# Altium PCB PCB1.PcbDoc
Units mm, origin at the board's own origin, x right, y up, seen from the top; angles counter-clockwise.
Board outline 171.3 x 137.74 mm, 2 copper layers (Top Layer, Bottom Layer); 76 components, 62 nets, 223 pads, 59 vias.
Unrouted connection lines stored in the file: 1.
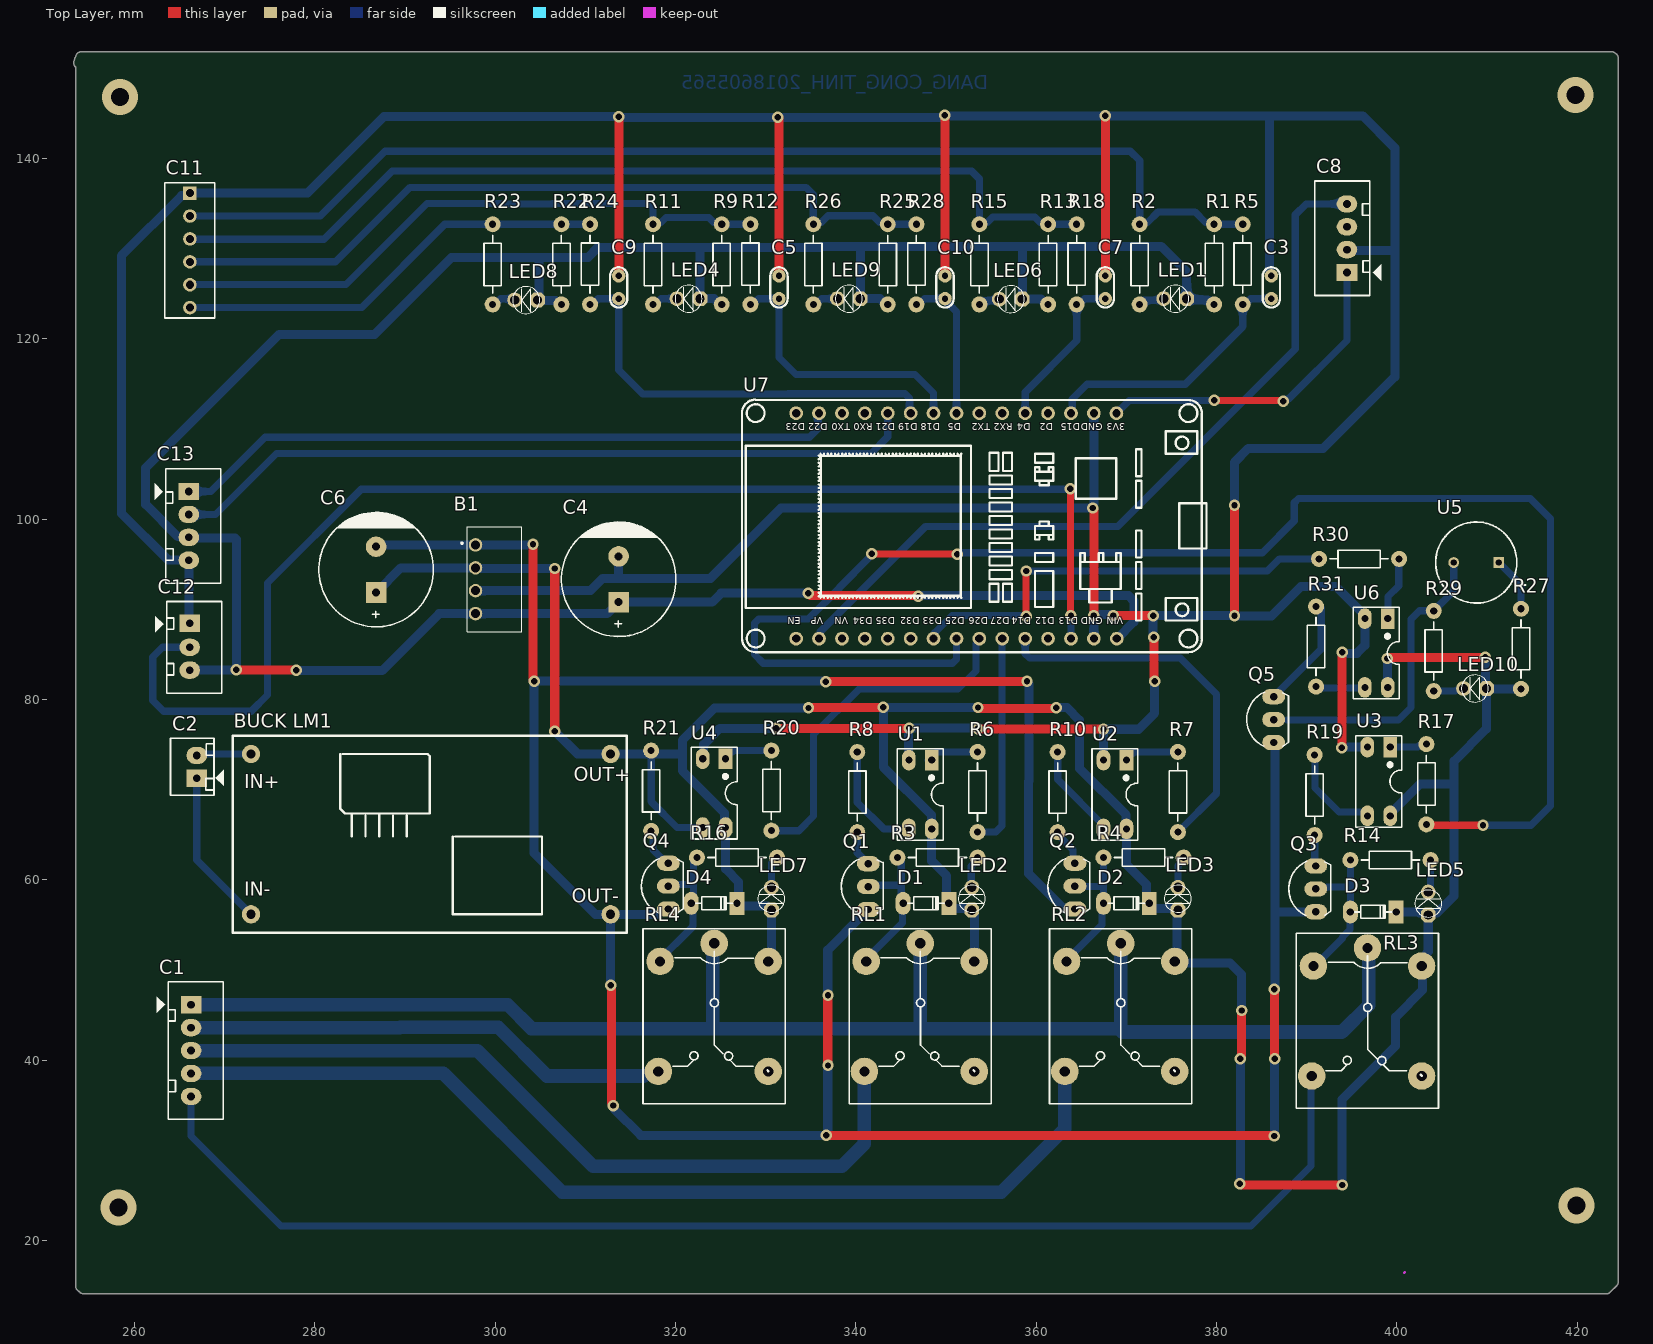
[diagram p0: Top Layer view]
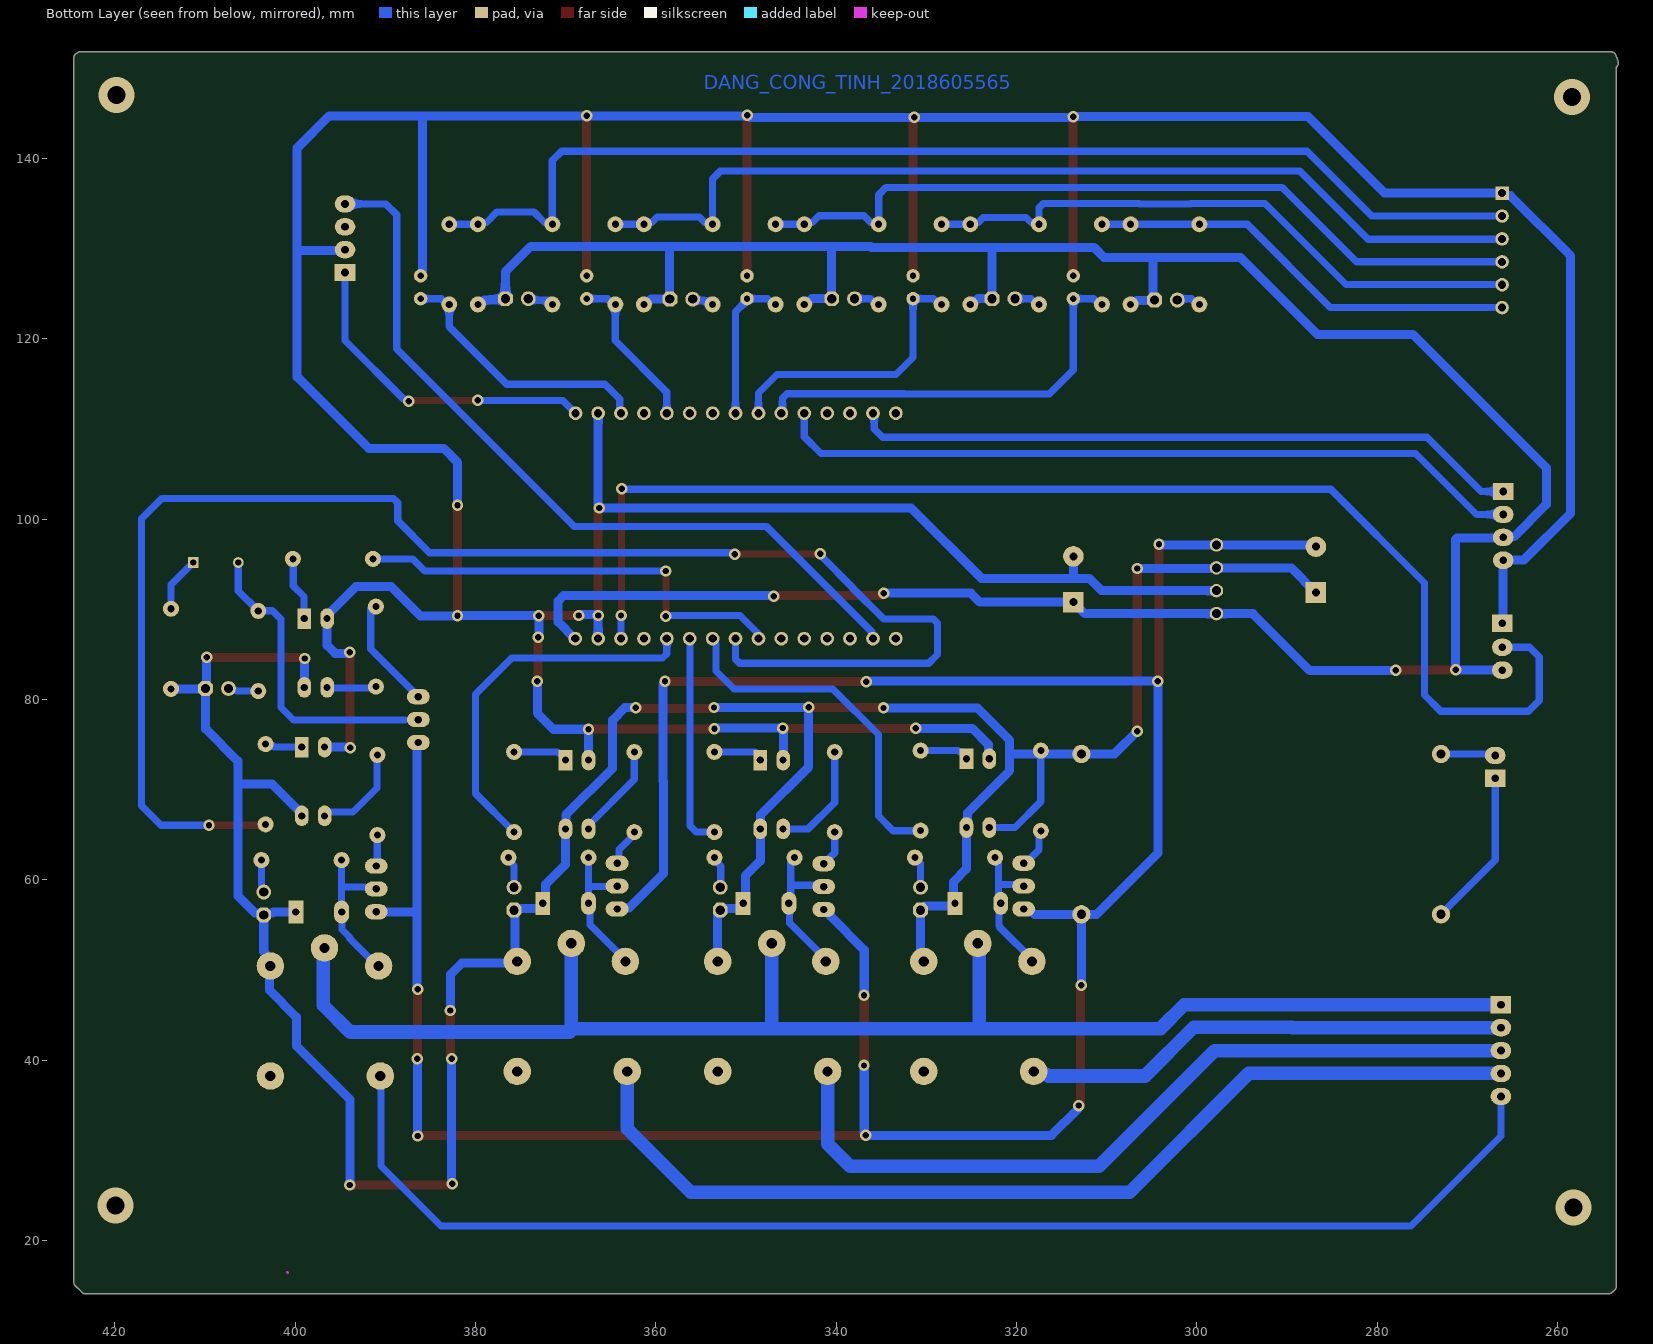
[diagram p1: Bottom Layer view, seen from below]
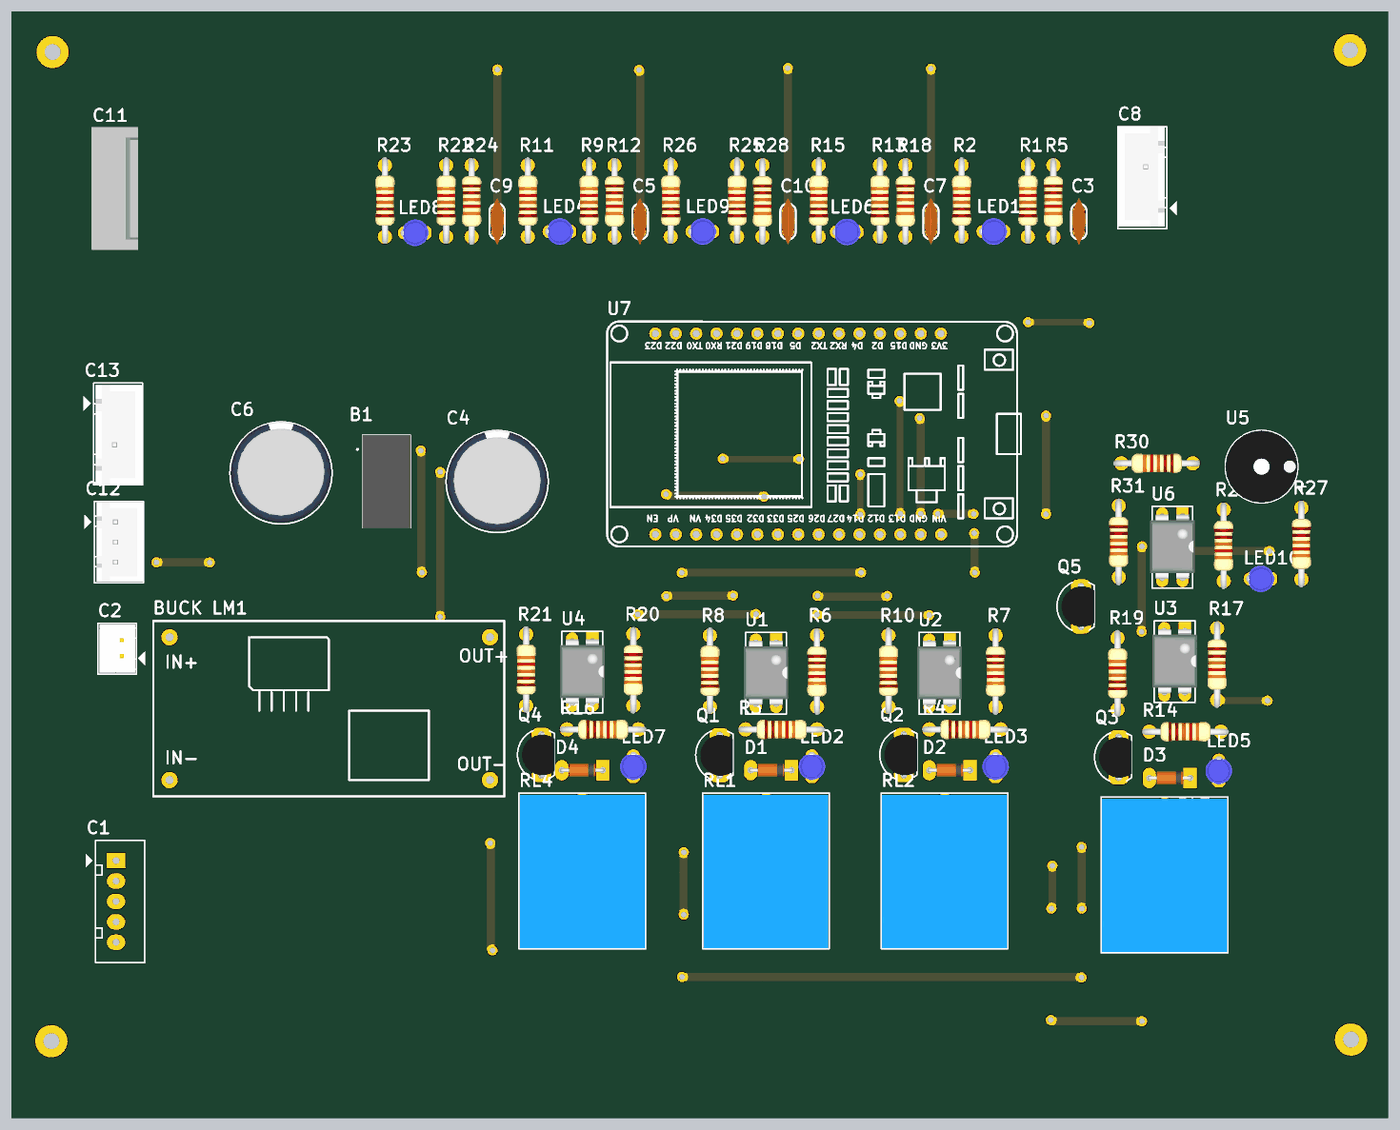
[diagram p2: 3D render of the assembled board from above, using the file's embedded part models]

## Layer stack, top to bottom
Top Solder: solder mask 0.0102, Solder Resist, Dk 3.5
Top Layer: signal copper 0.0356
Dielectric 1: dielectric 0.32, FR-4, Dk 4.8
Bottom Layer: signal copper 0.0356
Bottom Solder: solder mask 0.0102, Solder Resist, Dk 3.5

## Board outline
253.483,14.91 ccw(c254.083,14.91) 253.839,14.361 ccw(c254.33,14.707) 254.334,14.106 423.248,14.106 ccw(c423.248,14.707) 423.673,14.282 424.376,14.985 ccw(c423.951,15.41) 424.552,15.41 424.552,151.155 ccw(c423.951,151.155) 424.183,151.709 ccw(c423.799,151.248) 423.799,151.848 254.083,151.848 ccw(c254.083,151.248) 253.486,151.302 ccw(c254.457,150.597) 253.256,150.597 ccw(c253.857,150.597) 253.483,150.127

## Design rules (kind name [scope] priority, off if disabled: settings)
Clearance [All] p1: gap=1 ignorepadtopadclearanceinfootprint=FALSE
PolygonConnect [All] p1: connectstyle=Relief reliefconductorwidth=0.254 reliefentries=4 polygonreliefangle="90 Angle" airgapwidth=0.254
RoutingVias [All] p1: holewidth=0.711 width=1.27 viastyle="Through Hole" minholewidth=0.711 minwidth=1.27 maxholewidth=0.711 maxwidth=1.27
SolderMaskExpansion [All] p1: expansion=0.102 istentingtop=FALSE
Width GND_ISO [InNet('GND_ISO')] p1: maxlimit=1 minlimit=1 preferedwidth=1
Width COM_O_1 [InNet('COM_O_1')] p2: maxlimit=1.5 minlimit=1.5 preferedwidth=1.5
Width OUT_RL1 [InNet('OUT_RL1')] p3: maxlimit=1.5 minlimit=1.5 preferedwidth=1.5
Width OUT_RL2 [InNet('OUT_RL2')] p4: maxlimit=1.5 minlimit=1.5 preferedwidth=1.5
Width OUT_RL3 [InNet('OUT_RL3')] p5: maxlimit=1.5 minlimit=1.5 preferedwidth=1.5
Width VCC_ISO [InNet('VCC5_ISO')] p6: maxlimit=1 minlimit=1 preferedwidth=1
Width GND [InNet('GND')] p7: maxlimit=1 minlimit=1 preferedwidth=1
Width VCC [InNet('VCC5')] p8: maxlimit=1 minlimit=1 preferedwidth=1
Width SIGNAL [All] p9: maxlimit=0.8 minlimit=0.8 preferedwidth=0.8
30 further rules are at their usual default settings.

## Components (designator, comment, footprint, x,y, rotation, side; value= is the part's Value field where it differs from the comment)
B1 "B0505S1W" B0505S1W 297.815,97.155 r270 top
"BUCK LM1" "Buck LM2596" "BUCK LM2596" 292.481,65.837 r0 top
C1 "Header5" Header5 266.268,46.152 r270 top
C2 "Header2" Header2 266.903,71.272 r90 top
C3 "104" "tu gom" 386.08,125.73 r90 top
C4 "Cap Pol3" CP2/5 313.69,90.805 r90 top value=C?
C5 "104" "tu gom" 331.47,125.73 r90 top
C6 "Cap Pol3" CP2/5 286.791,91.872 r90 top value=C?
C7 "104" "tu gom" 367.665,125.73 r90 top
C8 "SS_HUMI" Header4 394.462,127.356 r90 top
C9 "104" "tu gom" 313.69,125.73 r90 top
C10 "104" "tu gom" 349.885,125.73 r90 top
C11 "Header6" HDR6 266.141,136.169 r270 top
C12 "1_WIRE_2" Header3 266.116,88.341 r270 top
C13 "LCD_I2C" Header4 266.014,103.073 r270 top
D1 "100v" "DIODE 0.5A" 347.777,57.404 r180 top
D2 "100v" "DIODE 0.5A" 370.002,57.404 r180 top
D3 "100v" "DIODE 0.5A" 397.383,56.439 r180 top
D4 "100v" "DIODE 0.5A" 324.282,57.404 r180 top
LED1 "LED 3mm" LED-3MM-BLUE 375.285,124.46 r180 top
LED2 "LED 3mm" LED-3MM-BLUE 352.857,58.039 r90 top
LED3 "LED 3mm" LED-3MM-BLUE 375.717,58.039 r90 top
LED4 "LED 3mm" LED-3MM-BLUE 321.31,124.46 r180 top
LED5 "LED 3mm" LED-3MM-BLUE 403.479,57.506 r90 top
LED6 "LED 3mm" LED-3MM-BLUE 357.048,124.409 r180 top
LED7 "LED 3mm" LED-3MM-BLUE 330.632,58.039 r90 top
LED8 "LED 3mm" LED-3MM-BLUE 303.301,124.308 r180 top
LED9 "LED 3mm" LED-3MM-BLUE 339.09,124.46 r180 top
LED10 "LED 3mm" LED-3MM-BLUE 408.534,81.229 r180 top
Q1 "C1815" C1815_cam 341.376,59.258 r90 top
Q2 "C1815" C1815_cam 364.287,59.309 r90 top
Q3 "C1815" C1815_cam 391.008,59.004 r90 top
Q4 "C1815" C1815_cam 319.202,59.309 r90 top
Q5 "C1815" C1815_cam 386.334,77.775 r90 top
R1 "10K" R1/4W 379.73,132.715 r270 top value="R1/4W - 1K"
R2 "220R" R1/4W 371.475,132.715 r270 top value="R1/4W - 1K"
R3 "510R" R1/4W 353.492,62.484 r180 top value="R1/4W - 1K"
R4 "390R" R1/4W 376.352,62.484 r180 top value="R1/4W - 1K"
R5 "1K" R1/4W 382.905,123.825 r90 top value="R1/4W - 1K"
R6 "100R" R1/4W 353.492,65.309 r90 top value="R1/4W - 1K"
R7 "220R" R1/4W 375.717,65.309 r90 top value="R1/4W - 1K"
R8 "510R" R1/4W 340.157,74.183 r270 top value="R1/4W - 1K"
R9 "10K" R1/4W 325.12,132.715 r270 top value="R1/4W - 1K"
R10 "560R" R1/4W 362.382,74.183 r270 top value="R1/4W - 1K"
R11 "220R" R1/4W 317.5,132.715 r270 top value="R1/4W - 1K"
R12 "1K" R1/4W 328.295,123.825 r90 top value="R1/4W - 1K"
R13 "10K" R1/4W 361.315,132.715 r270 top value="R1/4W - 1K"
R14 "510R" R1/4W 403.733,62.205 r180 top value="R1/4W - 1K"
R15 "220R" R1/4W 353.695,132.715 r270 top value="R1/4W - 1K"
R16 "510R" R1/4W 331.267,62.484 r180 top value="R1/4W - 1K"
R17 "100R" R1/4W 403.276,66.167 r90 top value="R1/4W - 1K"
R18 "1K" R1/4W 364.49,123.825 r90 top value="R1/4W - 1K"
R19 "510R" R1/4W 390.881,73.863 r270 top value="R1/4W - 1K"
R20 "100R" R1/4W 330.632,65.459 r90 top value="R1/4W - 1K"
R21 "510R" R1/4W 317.297,74.333 r270 top value="R1/4W - 1K"
R22 "10K" R1/4W 307.34,132.715 r270 top value="R1/4W - 1K"
R23 "220R" R1/4W 299.72,132.715 r270 top value="R1/4W - 1K"
R24 "1K" R1/4W 310.515,123.825 r90 top value="R1/4W - 1K"
R25 "10K" R1/4W 343.535,132.715 r270 top value="R1/4W - 1K"
R26 "220R" R1/4W 335.28,132.715 r270 top value="R1/4W - 1K"
R27 "510R" R1/4W 413.766,81.178 r90 top value="R1/4W - 1K"
R28 "1K" R1/4W 346.71,123.825 r90 top value="R1/4W - 1K"
R29 "510R" R1/4W 404.089,80.95 r90 top value="R1/4W - 1K"
R30 "100R" R1/4W 391.363,95.606 r0 top value="R1/4W - 1K"
R31 "510R" R1/4W 391.033,81.432 r90 top value="R1/4W - 1K"
RL1 "Relay" RELAY_SRA_05VDC_SL_C 347.142,52.959 r270 top
RL2 "Relay" RELAY_SRA_05VDC_SL_C 369.367,52.959 r270 top
RL3 "Relay" RELAY_SRA_05VDC_SL_C 396.742,52.452 r270 top
RL4 "Relay" RELAY_SRA_05VDC_SL_C 324.282,52.959 r270 top
U1 "PC817" DIP4/W0.3 348.412,73.282 r180 top
U2 "PC817" DIP4/W0.3 370.002,73.282 r180 top
U3 "PC817" DIP4/W0.3 399.263,74.727 r180 top
U4 "PC817" DIP4/W0.3 325.552,73.432 r180 top
U5 "BUZZ" BUZZER_D9_TH 407.802,95.199 r180 top
U6 "PC817" DIP4/W0.3 398.983,88.976 r180 top
U7 "ESP32_MODULE copy" ESP32-WIFIMODULE-FOOTPRINT 352.889,101.388 r90 top

## Footprints (in the part's own frame and the unit in brackets; to place one, negate y for a bottom-side part, rotate by r counter-clockwise, add the part's x,y. Pads: shape width x height; smd on the part's side, far side on the other; paste and mask are expansions set on the pad)
B0505S1W [mm]
  round 1.5 hole 1: 1(0,0) 2(2.54,0) 3(5.08,0) 4(7.62,0)
  silkscreen extent -1.99,-1.6 9.61,5.1, body extent -1.99,-0.9 9.61,5.1, height 10.1
"BUCK LM2596" [mil]
  round 80 hole 40: 1(-770,320) 2(-770,-380) 3(800,-380) 4(800,320)
  silkscreen extent -850,-460 870,400
BUZZER_D9_TH [mm]
  rect 1.2x1.2 hole 0.7: 1(-3.5,0)
  round 1.2 hole 0.7: 2(1.5,0)
  silkscreen extent -6.5,-4.5 3.5,4.5, body extent -5.5,-4.5 3.5,4.5, height 5.5
C1815_cam [mil]
  oval 66x100 hole 32: 1(-100,0) 2(0,0) 3(100,0)
  silkscreen extent -117,-65 120,118, body extent -109,-66 109,95, height 245
CP2/5 [mil]
  rect 90x90 hole 35: 1(0,0)
  round 90 hole 35: 2(200,0)
  silkscreen extent -150,-250 350,250, body extent -142,-246 350,246, height 984
"DIODE 0.5A" [mil] "Diode muoi, xung"
  oval 65x100 hole 32: 1(100,0)
  rect 65x100 hole 32: 2(-100,0)
  silkscreen extent -80,-30 80,28, body extent -108,-33 108,32, height 61
DIP4/W0.3 [mil]
  rect 60x90 hole 31: 1(0,0)
  oval 60x90 hole 31: 2(100,0) 3(100,300) 4(0,300)
  silkscreen extent -50,-50 150,350, body extent -59,-10 159,305, height 170
ESP32-WIFIMODULE-FOOTPRINT [mil]
  round 60 hole 36: 1(-575.9,768.25) 2(-575.9,668.25) 3(-575.9,568.25) 4(-575.9,468.25) 5(-575.9,368.25) 6(-575.9,268.25) 7(-575.9,168.25) 8(-575.9,68.25) 9(-575.9,-31.75) 10(-575.9,-131.75) 11(-575.9,-231.75) 12(-575.9,-331.75) 13(-575.9,-431.75) 14(-575.9,-531.75) 15(-575.9,-631.75) 16(408.35,-630.18) 17(408.35,-531.75) 18(408.35,-431.75) 19(408.35,-331.75) 20(408.35,-231.75) 21(408.35,-131.75) 22(408.35,-31.75) 23(408.35,68.25) 24(408.35,168.25) 25(408.35,268.25) 26(408.35,368.25) 27(408.35,468.25) 28(408.35,568.25) 29(408.35,668.25) 30(408.35,768.25)
  silkscreen extent -635,-1023 468,1005
HDR6 [mm] "Connector; Header; 6 Position"
  rect 1.5x1.5 hole 0.9: 1(0,0)
  round 1.5 hole 0.9: 2(2.54,0) 3(5.08,0) 4(7.62,0) 5(10.16,0) 6(12.7,0)
  silkscreen extent -1.14,-2.79 13.84,2.74, body extent -1.27,-2.92 13.97,2.88, height 11.72
Header2 [mil] "CON2"
  rect 75x90 hole 34: 1(0,0)
  oval 75x90 hole 34: 2(100,0)
  silkscreen extent -75,-118 175,115, body extent -68,-70 168,107, height 236
Header3 [mil] "CON 3"
  rect 75x90 hole 34: 1(-5,0)
  oval 75x90 hole 34: 2(100,0) 3(200,0)
  silkscreen extent -100,-150 300,140, body extent -95,-90 295,136, height 276
Header4 [mil] "CON4"
  rect 75x90 hole 34: 1(0,0)
  oval 75x90 hole 34: 2(100,0) 3(200,0) 4(300,0)
  silkscreen extent -100,-150 400,140, body extent -90,-90 398,136, height 276
Header5 [mil] "CON5"
  rect 75x90 hole 34: 1(0,0)
  oval 75x90 hole 34: 2(100,0) 3(200,0) 4(300,0) 5(400,0)
  silkscreen extent -100,-150 500,140
LED-3MM-BLUE [mil]
  oct 65x65 hole 40: 1(-55,0)
  round 65 hole 40: 2(45,0)
  silkscreen extent -64,-59 54,59, body extent -72,-65 54,65, height 184
R1/4W [mil]
  round 70 hole 31: 1(0,0) 2(350,0)
  silkscreen extent 48,-38 302,38, body extent -40,-47 386,47, height 111
RELAY_SRA_05VDC_SL_C [mil] "Relay SPDT, 5 pin, 10A,W 650mil, L 800mil, H 800mil"
  round 120 hole 45: 1(559.06,-243.78) 2(559.06,236.22) 3(78.74,236.22) 4(0,0) 5(78.74,-236.22)
  silkscreen extent -63,-311 700,310, body extent -55,-306 697,304, height 602
"tu gom" [mm] "Tu gom mini"
  round 1.5 hole 0.7: 1(-1.27,0) 2(1.27,0)
  silkscreen extent -2.25,-0.97 2.22,0.97, body extent -2.92,-0.85 2.92,0.85, height 6.12

## Part data
B1: "Power Supply", Manufacturer_Name=Mornsun, Manufacturer_Part_Number=B0505S-1W, Datasheet Link=https://www.mornsun-power.com/uploads/pdf/B_D-1W.pdf, Height=10.41mm
C1: "Header IDC, 5 x 1 Pin Vertical 2.54mm Pitch (Non-Boxed, Male)", Manufacturer="W¨¹rth Elektronik eiSos GmbH", partNo=613002143121, ComponentLink1 Description=Manufacturer, ComponentLink1URL=http://www.we-online.com, ComponentLink2 Description=Datasheet, ComponentLink2URL=http://katalog.we-online.de/em/datasheet/6130xx143121.pdf, Created by="Karrer Zheng", Created Date="29 March 2013", NoPins=02
C2: "Header IDC, 2 x 1 Pin Vertical 2.54mm Pitch (Non-Boxed, Male)", Manufacturer="W¨¹rth Elektronik eiSos GmbH", partNo=613002143121, ComponentLink1 Description=Manufacturer, ComponentLink1URL=http://www.we-online.com, ComponentLink2 Description=Datasheet, ComponentLink2URL=http://katalog.we-online.de/em/datasheet/6130xx143121.pdf, Created by="Karrer Zheng", Created Date="29 March 2013", NoPins=02
C3 C5 C7 C9 C10: library part "Tu gom 104 50V", "Cắm", Chung_Loai=Cắm, Don_Vi=Con, Ma_Hang=MH004761, So_Chan=2, Ten_Linh_Kien="Tụ gốm 104 100nF 50V"
C4 C6: "Polarized Capacitor (Surface Mount)", LatestRevisionDate=17-Jul-2002, LatestRevisionNote="Re-released for DXP Platform.", PackageReference=C0805, Publisher="Altium Limited"
C8 C13: library part Header4, "Header IDC, 4 x 1 Pin Vertical 2.54mm Pitch (Non-Boxed, Male)", Manufacturer="W¨¹rth Elektronik eiSos GmbH", partNo=613002143121, ComponentLink1 Description=Manufacturer, ComponentLink1URL=http://www.we-online.com, ComponentLink2 Description=Datasheet, ComponentLink2URL=http://katalog.we-online.de/em/datasheet/6130xx143121.pdf, Created by="Karrer Zheng", Created Date="29 March 2013", NoPins=02
C11: "Header IDC, 6 x 1 Pin Vertical 2.54mm Pitch (Non-Boxed, Male)", Manufacturer="W¨¹rth Elektronik eiSos GmbH", partNo=613002143121, ComponentLink1 Description=Manufacturer, ComponentLink1URL=http://www.we-online.com, ComponentLink2 Description=Datasheet, ComponentLink2URL=http://katalog.we-online.de/em/datasheet/6130xx143121.pdf, Created by="Karrer Zheng", Created Date="29 March 2013", NoPins=02
C12: library part Header3, "Header IDC, 3 x 1 Pin Vertical 2.54mm Pitch (Non-Boxed, Male)", Manufacturer="W¨¹rth Elektronik eiSos GmbH", partNo=613002143121, ComponentLink1 Description=Manufacturer, ComponentLink1URL=http://www.we-online.com, ComponentLink2 Description=Datasheet, ComponentLink2URL=http://katalog.we-online.de/em/datasheet/6130xx143121.pdf, Created by="Karrer Zheng", Created Date="29 March 2013", NoPins=02
D1 D2 D3 D4: library part "Diode 1N4148", "Cắm", Chung_Loai=Cắm, Don_Vi=Con, Ma_Hang=MH001065, Ten_Linh_Kien="Diode 1N4148 DO35 450mA 100V ( 1N4148 DIP)"
LED1 LED2 LED3 LED4 LED5 LED6 LED7 LED8 LED9 LED10: library part "LED 3mm Xanh Duong", "Cắm", Chung_Loai=Cắm, Don_Vi=Con, Ma_Hang=MH009003, Ten_Linh_Kien="LED 3MM Xanh Dương SS (1000c)"
Q1 Q2 Q3 Q4 Q5: "NPN 600mW, ECB"
R1 R2 R3 R4 R5 R6 R7 R8 R9 R10 R11 R12 R13 R14 R15 R16 R17 R18 R19 R20 R21 R22 R23 R24 R25 R26 R27 R28 R29 R30 R31: library part R1/4W, "Resistor 1/4W"
RL1 RL2 RL3 RL4: library part RL_SRA-05VDC-SL-C, "Relay 5 Chan", Ma_Hang=MH009374, Ten="Relay 5V10A SRD-05VDC-SL-C Chính Hãng"
U1 U2 U3 U4 U6: "Single Opto"
U5: library part Speaker, "Loudspeaker"

## Via types
v1: diameter 1.27, hole 0.711, Top Layer to Bottom Layer, 55 vias
v2: diameter 4, hole 2, Top Layer to Bottom Layer, 4 vias

## Nets (pads, with @x,y where several pads share a name; then routed paths per layer and width w, separated by ;. In a path a pad name is that pad's centre, name@x,y a point inside that pad or via, vN(x,y) a via of type N, cw(c..) or ccw(c..) an arc to the next point about the centre after c; other vN are vias at no path point)
1_WIRE_1: C12.2 U7.13 | length 145.8
  Top Layer w0.8: v1(363.756,103.381) 363.806,103.331 363.806,89.376 v1(363.855,89.327) ; U7.13 U7.13@363.918,86.823
  Bottom Layer w0.8: C12.2 263.093,85.801 262.026,84.734 262.026,79.908 263.22,78.715 272.948,78.715 274.752,80.518 274.752,92.939 285.14,103.327 363.703,103.327 v1(363.756,103.381) ; U7.13 v1(363.855,89.327)
COM_O_1: C1.1 RL1.4 RL2.4 RL3.4 RL4.4 | length 167.9
  Bottom Layer w1.5: C1.1 301.376,46.152 304.018,43.51 324.129,43.51 ; RL4.4 324.129,52.807 324.129,43.51 ; RL1.4 347.142,43.561 347.091,43.51 ; RL2.4 369.367,43.688 369.189,43.51 ; RL3.4@396.881,52.444 396.881,46.107 393.906,43.132 369.567,43.132 369.189,43.51 ; 324.129,43.51 347.091,43.51 ; 347.091,43.51 369.189,43.51
GND: "BUCK LM1.3" B1.1 C6.2 Q1.1 Q2.1 Q3.1 Q4.1 Q5.1 | length 324.2
  Top Layer w1: v1(304.19,97.206) 304.216,97.18 304.216,82.191 304.317,82.09 v1(304.317,82.017) ; v1(312.826,48.336) 312.877,48.285 312.877,35.277 313.106,35.049 v1(313.106,34.976) ; v1(336.652,81.988) 336.666,82.002 358.964,82.002 v1(358.978,82.017) ; v1(336.702,31.674) 386.261,31.674 386.337,31.598 v1(386.41,31.598) ; v1@336.88,39.421 336.88,47.168 v1(336.906,47.193) ; v1@386.41,40.183 v1(386.41,47.854)
  Bottom Layer w1: C6.2 286.995,97.155 B1.1 304.14,97.155 v1(304.19,97.206) ; v1(312.826,48.336) 312.801,48.362 312.801,56.185 ; v1(313.106,34.976) 313.157,34.924 313.157,34.645 316.128,31.674 v1(336.702,31.674) 336.702,31.747 336.88,31.925 336.88,39.395 v1(336.906,39.421) ; Q4.1 318.587,56.769 318.003,56.185 312.801,56.185 ; v1(336.652,81.988) 336.579,81.988 336.499,82.067 304.368,82.067 v1(304.317,82.017) 304.317,62.967 311.099,56.185 312.801,56.185 ; v1(336.906,47.193) 336.88,47.219 336.88,52.222 340.606,55.948 340.606,56.197 341.127,56.718 Q1.1 ; v1(358.978,82.017) 358.978,81.944 359.181,81.74 359.181,70.954 359.156,70.929 359.156,60.701 362.959,56.898 364.287,56.898 Q2.1@364.323,56.863 ; Q5.1 386.486,75.082 386.486,56.464 ; v1(386.41,31.598) 386.436,31.623 v1(386.436,40.183) ; v1(386.41,47.854) 386.462,47.905 386.462,48.096 386.486,48.121 386.486,56.464 ; Q3.1 386.486,56.464
GND_ISO: B1.3 C3.2 C4.2 C5.2 C7.2 C8.2 C9.2 C10.2 C11.1 C12.1 C13.4 U1.2 U2.2 U3.2 U4.2 U6.2 U7.14 U7.17 | length 574.8
  Top Layer w1: C9.2 313.715,127.025 v1(313.715,144.628) ; v1(331.191,76.81) 345.874,76.81 v1(345.907,76.843) ; C5.2 v1@331.47,144.577 ; C10.2 v1@349.885,144.628 ; v1(353.492,76.784) 353.543,76.733 367.436,76.733 v1(367.462,76.708) ; v1(366.268,101.244) 366.268,101.171 366.395,101.044 v1(366.395,89.327) ; C7.2 v1@367.665,144.653 ; v1(368.527,89.327) 368.547,89.306 v1(372.974,89.306) ; v1@373.075,86.919 373.075,82.067 v1(373.126,82.017) ; v1(381.991,89.281) v1(381.991,101.549) ; v1(393.878,74.651) 393.903,74.676 393.903,85.242 v1(393.929,85.268)
  Bottom Layer w1: C12.1 266.014,88.57 C13.4 265.989,95.479 263.728,95.479 258.547,100.66 258.547,129.217 265.209,135.879 265.305,135.879 265.345,135.919 265.891,135.919 C11.1 279.171,136.169 287.655,144.653 313.69,144.653 313.766,144.577 v1(331.343,144.577) 349.558,144.577 349.787,144.805 v1(349.86,144.805) 349.911,144.754 350.102,144.754 350.127,144.729 385.851,144.729 ; B1.3 310.553,92.075 311.926,93.448 313.538,93.448 ; C4.2 313.69,93.6 313.538,93.448 ; U4.2 323.112,73.532 323.112,75.018 324.904,76.81 v1(331.191,76.81) ; U1.2 345.809,73.344 345.809,76.672 345.907,76.77 v1(345.907,76.843) 353.36,76.843 353.419,76.784 v1(353.492,76.784) ; U7.14 v1(366.395,89.327) 366.395,89.432 366.408,89.445 367.453,89.445 367.467,89.458 368.322,89.458 368.454,89.327 v1(368.527,89.327) ; U7.17 366.395,101.675 366.32,101.599 366.32,101.296 v1(366.268,101.244) v1(366.268,101.244) 331.674,101.246 323.876,93.448 313.538,93.448 ; U2.2@367.462,73.914 v1(367.462,76.708) 371.348,76.708 373.126,78.486 v1(373.126,82.017) ; v1(373.05,86.919) 372.998,86.97 372.998,87.161 372.974,87.186 v1(372.974,89.306) 381.965,89.306 382.016,89.256 386.077,89.256 389.38,92.559 393.241,92.559 396.272,89.528 396.272,89.147 U6.2 396.443,86.004 395.554,85.115 394.154,85.115 394.002,85.268 v1(393.929,85.268) ; v1(381.991,101.549) 381.991,106.299 383.54,107.848 391.82,107.848 399.771,115.799 399.771,141.173 396.215,144.729 385.851,144.729 ; C3.2 385.984,127.096 385.984,127.449 385.851,127.582 385.851,144.729 ; v1(393.878,74.651) 393.951,74.651 394.027,74.727 U3.2 ; C8.2 394.538,129.819 399.288,129.819
  other v1: 367.665,144.729
IN_1: C3.1 R5.1 U7.18 | length 29.8
  Bottom Layer w0.8: U7.18 363.994,111.899 363.994,113.335 365.641,114.982 376.526,114.982 382.905,121.361 R5.1 383.17,123.825 383.805,124.46 C3.1
IN_2: C7.1 R18.1 U7.20 | length 17.9
  Bottom Layer w0.8: U7.20 358.775,114.097 364.49,119.812 R18.1 364.755,123.825 365.39,124.46 C7.1
IN_3: C10.1 R28.1 U7.23 | length 16.7
  Bottom Layer w0.8: R28.1 346.975,123.825 347.61,124.46 C10.1 349.885,124.271 351.155,123.001 U7.23
IN_4: C5.1 R12.1 U7.24 | length 31
  Bottom Layer w0.8: R12.1 328.56,123.825 329.195,124.46 C5.1 331.47,117.932 333.35,116.053 346.558,116.053 348.615,113.995 U7.24
IN_5: C9.1 R24.1 U7.25 | length 46.6
  Bottom Layer w0.8: R24.1 310.78,123.825 311.415,124.46 C9.1 313.69,116.561 316.357,113.894 332.451,113.894 332.479,113.922 345.439,113.922 345.936,113.425 345.936,111.899 U7.25
"NetBUCK LM1_2": "BUCK LM1.2" C2.1 | length 17.6
  Bottom Layer w0.8: C2.1 266.903,62.205 272.923,56.185
NetD1_1: D1.1 Q1.2 R3.2 RL1.5 | length 17.2
  Bottom Layer w0.8: RL1.5@340.71,50.652 340.71,50.788 345.161,55.238 345.161,57.294 345.032,57.423 345.032,59.36 ; Q1.2@341.807,59.403 344.99,59.403 345.032,59.36 ; R3.2@344.904,62.616 345.032,62.487 345.032,59.36
NetD2_1: D2.1 Q2.2 R4.2 RL2.5 | length 16.6
  Bottom Layer w0.8: RL2.5@363.226,50.788 363.226,50.953 367.299,55.026 D2.1@367.299,57.404 ; Q2.2 364.312,59.284 367.462,59.284 ; D2.1 367.462,59.284 ; R4.2 367.462,59.284
NetD3_1: D3.1 Q3.2 R14.2 RL3.5 | length 17.3
  Bottom Layer w0.8: RL3.5@390.881,50.444 393.957,53.52 393.957,53.656 394.792,54.491 394.792,56.388 D3.1 394.843,59.207 ; Q3.2 391.175,59.172 392.227,59.172 392.262,59.207 394.843,59.207 ; R14.2@395.072,62.128 395.072,61.864 394.843,61.635 394.843,59.207
NetD4_1: D4.1 Q4.2 R16.2 RL4.5 | length 16.6
  Bottom Layer w0.8: RL4.5@317.983,50.754 317.983,50.889 321.843,54.75 321.843,54.842 321.92,54.918 321.92,57.371 321.996,57.447 321.996,59.538 ; Q4.2@319.08,59.479 321.937,59.479 321.996,59.538 ; R16.2@322.072,62.717 321.996,62.641 321.996,59.538
NetLED1_2: LED1.2 R2.2 | length 2.9
  Bottom Layer w0.8: R2.2 371.74,123.825 372.212,124.297 373.979,124.297 LED1.2
NetLED2_2: LED2.2 R3.1 | length 3.6
  Bottom Layer w0.8: LED2.2 352.806,59.233 352.806,61.534 353.492,62.219 R3.1
NetLED3_2: LED3.2 R4.1 | length 3.6
  Bottom Layer w0.8: LED3.2 375.717,61.584 376.352,62.219 R4.1
NetLED4_2: LED4.2 R11.2 | length 2.9
  Bottom Layer w0.8: R11.2 317.765,123.825 318.4,124.46 LED4.2
NetLED5_2: LED5.2 R14.1 | length 3.7
  Bottom Layer w0.8: LED5.2 403.479,58.879 403.733,59.133 R14.1
NetLED6_2: LED6.2 R15.2 | length 2.5
  Bottom Layer w0.8: R15.2 353.96,123.825 354.381,124.246 355.742,124.246 LED6.2
NetLED7_2: LED7.2 R16.1 | length 3.5
  Bottom Layer w0.8: LED7.2 330.632,61.887 331.08,62.335 R16.1@330.962,62.453
NetLED8_2: LED8.2 R23.2 | length 2.7
  Bottom Layer w0.8: R23.2 299.985,123.825 300.62,124.46 LED8.2@302.157,124.46
NetLED9_2: LED9.2 R26.2 | length 2.9
  Bottom Layer w0.8: R26.2 335.545,123.825 336.18,124.46 LED9.2
NetLED10_2: LED10.2 R29.1 | length 3.4
  Bottom Layer w0.8: R29.1 406.509,80.95 406.626,81.066 407.228,81.066 LED10.2
NetQ1_3: Q1.3 R8.2 | length 4.1
  Bottom Layer w0.8: R8.2 340.157,63.017 340.777,62.398 340.777,62.203 341.181,61.798 Q1.3
NetQ2_3: Q2.3 R10.2 | length 4.2
  Bottom Layer w0.8: R10.2 362.382,65.029 364.067,63.343 364.067,62.069 Q2.3
NetQ3_3: Q3.3 R19.2 | length 3.5
  Bottom Layer w0.8: R19.2 390.881,61.671 Q3.3
NetQ4_3: Q4.3 R21.2 | length 4.5
  Bottom Layer w0.8: R21.2 317.484,65.256 317.484,63.372 319.007,61.849 Q4.3
NetQ5_2: Q5.2 R29.2 U5.2 | length 33.3
  Bottom Layer w0.8: 387.807,77.724 400.177,77.724 401.574,79.121 401.574,88.9 402.514,89.84 R29.2 406.302,92.053 U5.2
NetQ5_3: Q5.3 R31.2 | length 12.2
  Bottom Layer w0.8: Q5.3 386.529,80.315 386.933,80.72 386.933,80.914 391.617,85.598 R31.2@391.617,90.17
NetR6_2: R6.2 U1.1 | length 5.8
  Bottom Layer w0.8: U1.1@348.034,73.282 348.951,74.199 R6.2
NetR7_2: R7.2 U2.1 | length 6.3
  Bottom Layer w0.8: U2.1 370.002,73.663 370.364,74.025 370.745,74.025 370.919,74.199 R7.2
NetR8_1: R8.1 U1.3 | length 12.5
  Bottom Layer w0.8: R8.1 340.157,68.599 343.094,65.662 U1.3
NetR10_1: R10.1 U2.3 | length 10.6
  Bottom Layer w0.8: R10.1 362.382,71.123 367.462,66.043 U2.3
NetR17_2: R17.2 U3.1 | length 4.1
  Bottom Layer w0.8: U3.1 402.318,74.727 402.461,74.87 403.089,74.87 R17.2
NetR19_1: R19.1 U3.3 | length 10.8
  Bottom Layer w0.8: R19.1 390.931,73.812 390.931,70.18 393.573,67.539 396.388,67.539 396.723,67.204 U3.3
NetR20_2: R20.2 U4.1 | length 5.7
  Bottom Layer w0.8: U4.1 325.552,73.813 325.914,74.175 326.295,74.175 326.469,74.349 R20.2
NetR21_1: R21.1 U4.3 | length 12.5
  Bottom Layer w0.8: R21.1 317.297,68.681 320.166,65.812 322.677,65.812 322.677,65.73 U4.3@322.809,65.599
NetR27_2: R27.2 U5.1 | length 6.2
  Bottom Layer w0.8: U5.1 413.766,92.735 R27.2
NetR30_2: R30.2 U6.1 | length 6.6
  Bottom Layer w0.8: U6.1@398.983,89.56 399.029,89.606 399.029,91.435 400.202,92.608 400.202,95.555 R30.2
NetR31_1: R31.1 U6.3 | length 5.2
  Bottom Layer w0.8: R31.1@391.617,81.28 395.783,81.28 395.924,81.421 396.109,81.421 396.443,81.755 U6.3@396.443,81.94
OUT_1: R7.1 U7.11 | length 41.8
  Bottom Layer w0.8: U7.11 358.775,85.067 359.244,84.598 369.831,84.598 369.84,84.607 375.971,84.607 380.009,80.569 380.009,69.601 R7.1
OUT_2: R6.1 U7.10 | length 23.8
  Bottom Layer w0.8: R6.1 355.504,65.309 356.21,66.015 356.21,86.735 U7.10
OUT_3: R20.1 U7.9 | length 39.1
  Bottom Layer w0.8: R20.1 333.683,65.459 335.305,67.081 335.305,76.124 340.363,81.181 351.336,81.181 353.317,83.163 353.317,86.186 353.695,86.564 U7.9
OUT_4: R17.1 U7.8 | length 171.9
  Top Layer w0.8: v1(341.757,96.19) 341.808,96.139 v1(351.257,96.139) 351.257,96.012 v1@351.155,95.91 ; R17.1 403.377,66.065 v1(409.55,66.065)
  Bottom Layer w0.8: v1(341.757,96.19) 341.757,96.063 341.522,95.828 341.522,95.777 338.198,92.453 338.198,92.394 334.729,88.925 329.221,88.925 328.752,88.457 328.752,84.988 329.717,84.023 350.698,84.023 351.155,84.48 U7.8 ; v1(351.257,96.139) 351.347,96.229 351.679,96.229 351.741,96.291 358.031,96.291 358.034,96.294 385.092,96.294 388.62,99.822 388.62,101.843 389.089,102.311 414.782,102.311 417.043,100.051 417.043,68.224 414.884,66.065 v1(409.55,66.065)
OUT_BTN_1: C11.2 R1.1 R2.1 R5.2 | length 128.6
  Bottom Layer w0.8: C11.2 280.602,133.629 287.787,140.815 370.437,140.815 371.475,139.776 R2.1 371.662,132.902 372.354,132.902 373.541,134.09 377.601,134.09 378.789,132.902 379.543,132.902 R1.1 R5.2 R5.2@382.727,132.893
OUT_BTN_2: C11.3 R13.1 R15.1 R18.2 | length 107.5
  Bottom Layer w0.8: C11.3 266.167,131.064 281,131.064 288.544,138.608 352.857,138.608 353.695,137.77 R15.1 353.882,132.902 354.574,132.902 355.178,133.507 359.832,133.507 360.436,132.902 361.128,132.902 R13.1 R18.2
OUT_BTN_3: C11.4 R25.1 R26.1 R28.2 | length 88.4
  Bottom Layer w0.8: C11.4 282.296,128.549 290.554,136.808 334.464,136.808 335.28,135.992 R26.1 335.467,132.902 336.159,132.902 336.917,133.661 341.898,133.661 342.656,132.902 343.348,132.902 R25.1 R28.2
OUT_BTN_4: C11.5 R9.1 R11.1 R12.2 | length 68.6
  Bottom Layer w0.8: C11.5 266.167,126.035 283.464,126.035 292.433,135.004 300.668,135.004 300.722,134.95 306.338,134.95 306.392,135.004 317.031,135.004 317.5,134.535 R11.1 317.687,132.902 318.379,132.902 318.934,133.457 323.686,133.457 324.241,132.902 324.933,132.902 R9.1 R12.2
OUT_BTN_5: C11.6 R22.1 R23.1 R24.2 | length 48.2
  Bottom Layer w0.8: C11.6 275.748,123.469 275.774,123.495 285.191,123.495 294.411,132.715 R23.1 R22.1 R24.2
OUT_BUZ: R30.1 U7.7 | length 49.7
  Top Layer w0.8: v1(358.877,89.256) v1(358.877,94.259)
  Bottom Layer w0.8: U7.7 348.754,86.899 348.754,87.41 348.944,87.601 348.944,87.606 350.664,89.327 358.806,89.327 v1(358.877,89.256) ; v1(358.877,94.259) 385.628,94.259 386.975,95.606 R30.1
OUT_RL1: C1.4 RL2.1 | length 111.6
  Bottom Layer w1.5: C1.4 294.259,38.532 307.442,25.349 356.108,25.349 363.175,32.416 RL2.1
OUT_RL2: C1.3 RL1.1 | length 89.1
  Bottom Layer w1.5: C1.3 298.018,41.072 310.871,28.219 338.43,28.219 340.95,30.74 RL1.1
OUT_RL3: C1.2 RL4.1 | length 54.3
  Bottom Layer w1.5: C1.2 289.433,43.612 289.473,43.652 300.34,43.652 305.74,38.252 316.489,38.252 316.699,38.463 317.794,38.463 RL4.1
OUT_RL4: C1.5 RL3.1 | length 145.6
  Bottom Layer w0.8: C1.5 266.268,31.598 276.25,21.615 383.819,21.615 390.474,28.27 390.474,38.03 RL3.1@390.689,38.244
SCL: C13.1 U7.29 | length 74.4
  Bottom Layer w0.8: C13.1 268.443,103.073 274.462,109.092 334.847,109.092 335.776,110.021 335.776,111.621 U7.29
SDA: C13.2 U7.26 | length 83.7
  Bottom Layer w0.8: C13.2 268.981,100.533 275.74,107.292 341.683,107.292 343.535,109.144 U7.26
SS_FLAME: C8.4 U7.2 | length 87.6
  Bottom Layer w0.8: U7.2 336.054,86.899 336.054,87.515 347.748,99.209 369.059,99.209 388.737,118.887 388.737,133.772 389.941,134.976 C8.4
VCC5: "BUCK LM1.4" B1.2 C6.1 D1.2 D2.2 D3.2 D4.2 LED2.1 LED3.1 LED5.1 LED7.1 LED10.1 R27.1 RL1.3 RL2.3 RL3.3 RL4.3 U1.4 U2.4 U3.4 U4.4 U6.4 | length 335.4
  Top Layer w1: v1(306.603,76.505) v1(306.603,94.539) ; v1(334.747,79.07) 334.798,79.122 335.24,79.122 335.264,79.146 v1(343.052,79.146) ; v1@353.543,78.994 362.055,78.994 362.156,79.096 v1(362.229,79.096) ; RL2.3@375.209,50.801 RL2.3 ; v1(382.575,26.314) 382.648,26.314 382.8,26.162 v1(393.929,26.162) ; v1(382.651,40.183) 382.703,40.234 382.703,40.425 382.778,40.501 v1(382.778,45.517) ; v1(398.932,84.557) 399.005,84.557 399.132,84.684 v1(409.804,84.684)
  Bottom Layer w1: C6.1 289.535,94.615 B1.2 297.891,94.539 v1(306.603,94.539) ; v1(306.603,76.505) 309.143,73.965 312.801,73.965 320.472,73.965 ; D4.2@327,57.117 330.183,57.117 LED7.1@330.352,56.947 ; D4.2@327,57.371 327,59.766 325.552,61.214 U4.4 325.452,65.912 325.452,67.412 320.75,72.114 320.75,75.485 324.335,79.07 v1(334.747,79.07) ; RL4.3 330.632,51.309 LED7.1 ; RL1.3 353.142,56.237 352.857,56.522 LED2.1 352.651,56.848 350.642,56.848 350.317,57.173 D1.2 350.063,57.658 350.063,60.452 348.412,62.103 U1.4 348.372,65.702 348.372,67.202 343.052,72.521 v1(343.052,79.146) 343.078,79.121 v1(353.543,79.121) ; v1(362.229,79.096) 363.423,79.096 364.795,77.724 364.795,72.369 369.962,67.202 369.962,65.702 U2.4 370.002,61.727 372.25,59.479 372.25,57.307 372.262,57.294 372.262,57.175 372.588,56.85 LED3.1@375.539,56.85 ; RL2.3@375.367,50.801 381.481,50.801 382.778,49.504 v1(382.778,45.517) ; RL2.3 375.641,51.233 375.641,56.566 LED3.1 ; v1(382.575,26.314) 382.626,26.366 382.626,26.557 382.651,26.582 v1(382.651,40.183) ; v1(393.929,26.162) 393.929,35.662 399.857,41.59 399.857,44.79 402.867,47.8 402.867,50.431 403.272,50.836 403.272,51.848 403.479,52.054 LED5.1 ; v1(398.932,84.557) 398.983,84.506 U6.4 ; U3.4 399.263,67.346 399.666,67.75 402.579,70.663 406.351,70.663 ; D3.2 402.4,56.439 402.516,56.323 402.733,56.323 402.742,56.314 403.273,56.314 LED5.1 ; v1(409.804,84.684) 409.804,81.356 LED10.1 ; R27.1 409.981,81.178 LED10.1 ; LED5.1 403.685,56.314 404.216,56.314 404.225,56.323 404.442,56.323 406.351,58.231 406.351,70.663 ; 406.351,70.663 406.351,73.179 409.931,76.759 LED10.1
VCC5_ISO: B1.4 C4.1 C12.3 C13.3 LED1.1 LED4.1 LED6.1 LED8.1 LED9.1 R1.2 R9.2 R13.2 R22.2 R25.2 U7.15 | length 310.3
  Top Layer w1: v1(271.297,83.287) 277.901,83.287 v1(277.927,83.261) ; v1(334.696,91.77) 334.769,91.77 334.972,91.567 346.621,91.567 346.674,91.513 346.865,91.513 v1(346.917,91.462)
  Bottom Layer w1: C12.3 v1@271.272,83.261 ; v1@271.323,83.312 271.323,97.742 271.159,97.906 266.102,97.906 C13.3 265.927,98.081 264.808,98.081 261.239,101.65 261.239,105.689 276.047,120.498 286.614,120.498 295.131,129.015 303.144,129.015 ; v1@277.875,83.21 287.451,83.21 293.776,89.535 B1.4 312.42,89.535 C4.1 324.062,90.805 325.052,91.796 334.67,91.796 v1(334.696,91.77) ; 303.352,129.015 304.876,129.015 310.265,129.015 311.4,130.15 322.448,130.15 ; 304.876,128.829 304.876,124.485 LED8.1 304.698,124.506 304.881,124.506 305.133,124.254 306.7,124.254 307.129,123.825 R22.2 ; 322.707,129.89 LED4.1 324.274,124.46 324.909,123.825 R9.2 ; 322.783,130.15 336.093,130.15 336.195,130.251 340.487,130.251 ; R25.2 343.324,123.825 342.689,124.46 LED9.1 340.487,130.251 ; v1(346.917,91.462) 346.969,91.513 347.16,91.513 347.163,91.516 370.253,91.516 370.839,90.93 370.839,88.619 368.979,86.76 U7.15 ; R13.2 361.104,123.825 360.52,124.409 LED6.1 358.496,124.46 358.496,130.251 ; R1.2 379.519,123.825 379.007,124.337 376.805,124.337 LED1.1 376.682,127.432 373.863,130.251 358.496,130.251 ; 340.487,130.251 358.496,130.251
VCC12: "BUCK LM1.1" C2.2 | length 6.1
  Bottom Layer w0.8: C2.2 267.056,73.965 272.923,73.965
VCC33_ISO: C8.1 U7.16 | length 36.5
  Top Layer w0.8: v1(379.755,113.182) 387.147,113.182 387.248,113.081 v1(387.375,113.081)
  Bottom Layer w0.8: U7.16 370.317,113.182 v1(379.755,113.182) ; v1(387.375,113.081) 387.503,113.081 387.738,113.316 387.941,113.316 394.462,119.837 C8.1
pads on no net: C8.3 RL1.2 RL2.2 RL3.2 RL4.2 U7.1 U7.3 U7.4 U7.5 U7.6 U7.12 U7.19 U7.21 U7.22 U7.27 U7.28 U7.30
copper on no net: | length 0.4
  Top Layer w0.8: 361.315,86.76 361.378,86.823
  Bottom Layer w0.8: 345.936,86.621 346.075,86.76 ; 361.315,86.76 361.366,86.811
  other v2: 258.216,23.673 419.938,23.876 258.369,146.812 419.811,147.041

## Keep-outs
Keep-Out Layer:
  lines w0.254: 400.812,16.434 400.863,16.485

## Other copper
Bottom Layer:
  text "DANG_CONG_TINH_2018605565" at 354.66,147.676 h1.52

## Text inside footprints (layer, text, board x,y; h text height)
"BUCK LM1": Top Overlay "IN+" at 272.161,70.155 h1.52; Top Overlay "IN-" at 272.161,58.217 h1.52; Top Overlay "OUT+" at 308.737,70.917 h1.52; Top Overlay "OUT-" at 308.483,57.455 h1.52
U7: Top Overlay "VIN" at 369.675,89.135 h0.75 r180; Top Overlay "GND" at 367.375,89.135 h0.75 r180; Top Overlay "D13" at 364.675,89.135 h0.75 r180; Top Overlay "D12" at 362.075,89.135 h0.75 r180; Top Overlay "D14" at 359.475,89.135 h0.75 r180; Top Overlay "D27" at 357.075,89.135 h0.75 r180; Top Overlay "D26" at 354.675,89.135 h0.75 r180; Top Overlay "D25" at 352.075,89.135 h0.75 r180; Top Overlay "D33" at 349.575,89.135 h0.75 r180; Top Overlay "D32" at 347.075,89.135 h0.75 r180; Top Overlay "D35" at 344.375,89.135 h0.75 r180; Top Overlay "D34" at 341.875,89.135 h0.75 r180; Top Overlay "VN" at 339.175,89.135 h0.75 r180; Top Overlay "VP" at 336.375,89.135 h0.75 r180; Top Overlay "EN" at 333.875,89.135 h0.75 r180; Top Overlay "3V3" at 369.875,110.635 h0.75 r180; Top Overlay "GND" at 367.375,110.635 h0.75 r180; Top Overlay "D15" at 364.875,110.635 h0.75 r180; Top Overlay "D2" at 361.875,110.635 h0.75 r180; Top Overlay "D4" at 359.375,110.635 h0.75 r180; Top Overlay "RX2" at 357.375,110.635 h0.75 r180; Top Overlay "TX2" at 354.875,110.635 h0.75 r180; Top Overlay "D5" at 351.675,110.635 h0.75 r180; Top Overlay "D18" at 349.375,110.635 h0.75 r180; Top Overlay "D19" at 346.875,110.635 h0.75 r180; Top Overlay "D21" at 344.375,110.635 h0.75 r180; Top Overlay "RX0" at 341.875,110.635 h0.75 r180; Top Overlay "TX0" at 339.375,110.635 h0.75 r180; Top Overlay "D22" at 336.875,110.635 h0.75 r180; Top Overlay "D23" at 334.375,110.635 h0.75 r180